# Altium PCB PCB.PcbDoc (part 1 of 2)
Units mil, origin at the board's own origin, x right, y up, seen from the top; angles counter-clockwise.
Board outline 3500 x 2500 mil, 4 copper layers (Layer 1, Layer 2, Layer 3, Layer 4), stack 61.3 mil thick; 75 components, 48 nets, 305 pads, 283 vias.
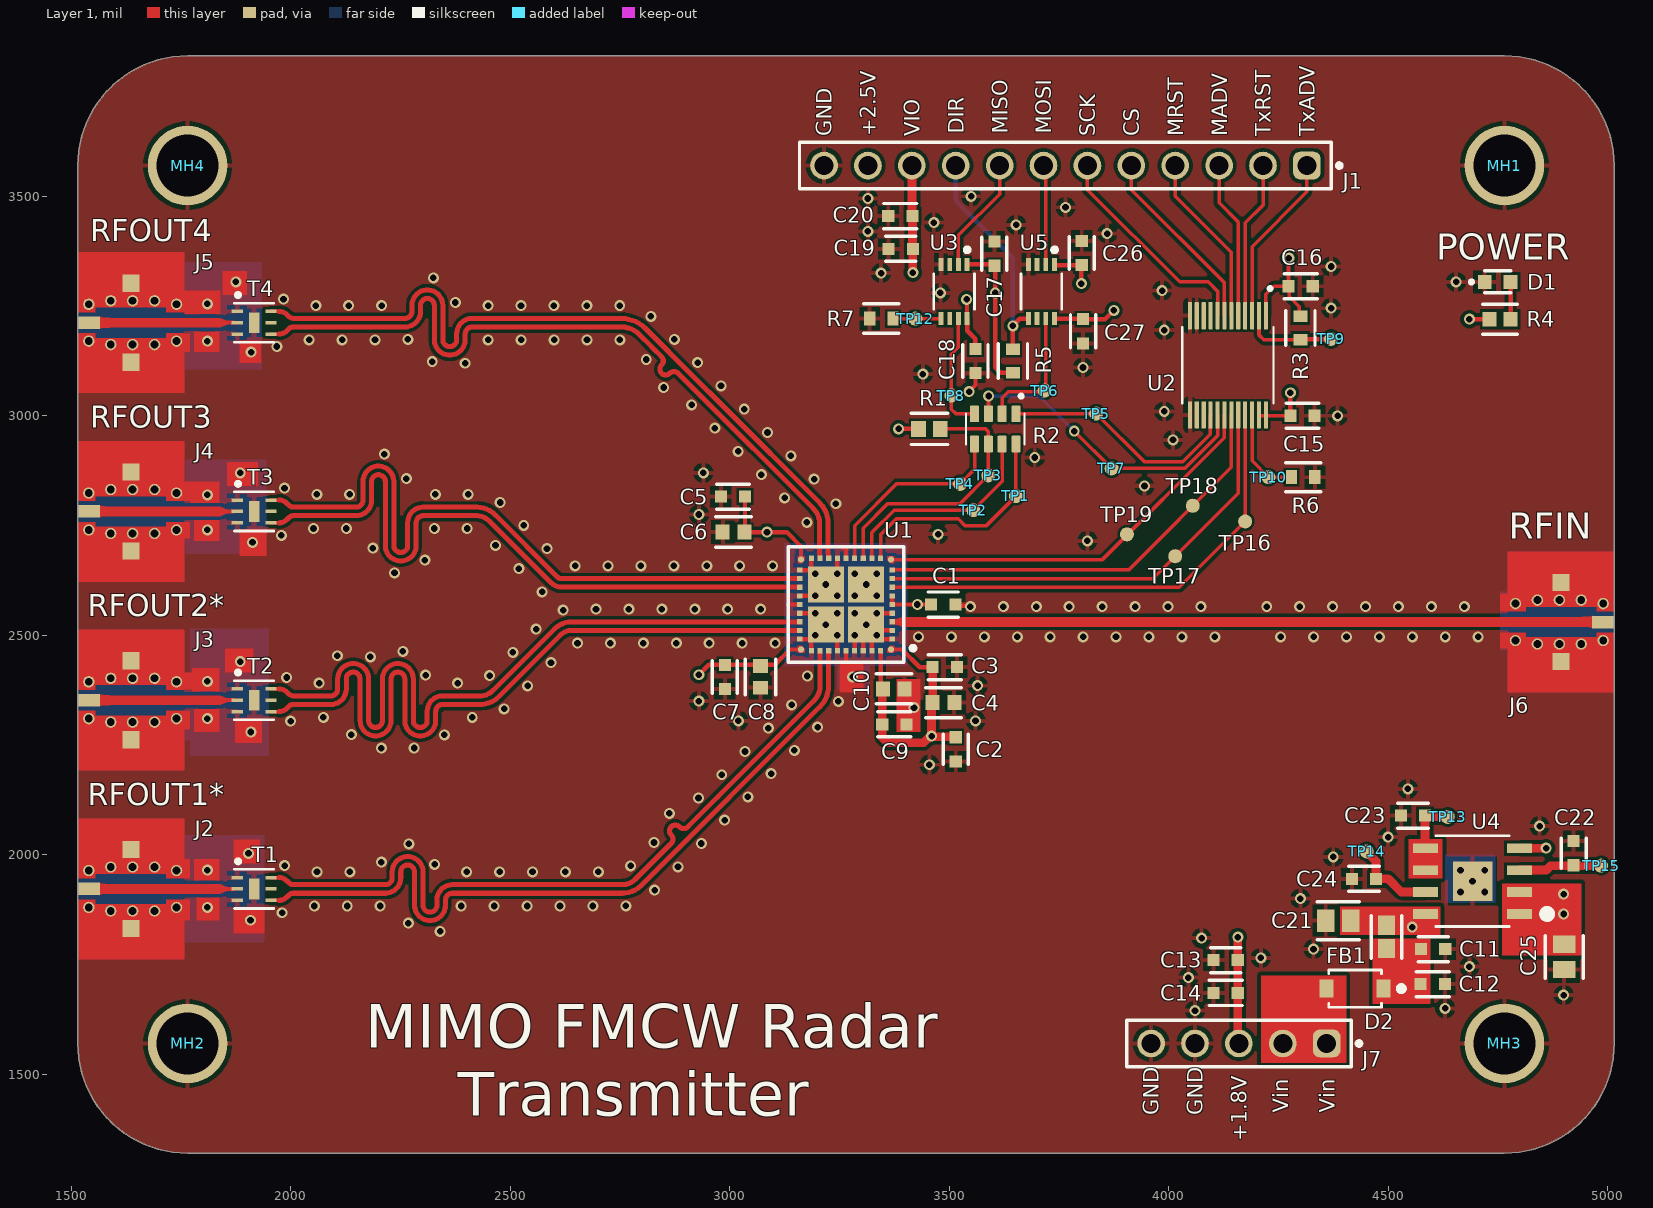
[diagram p0: Layer 1 view]
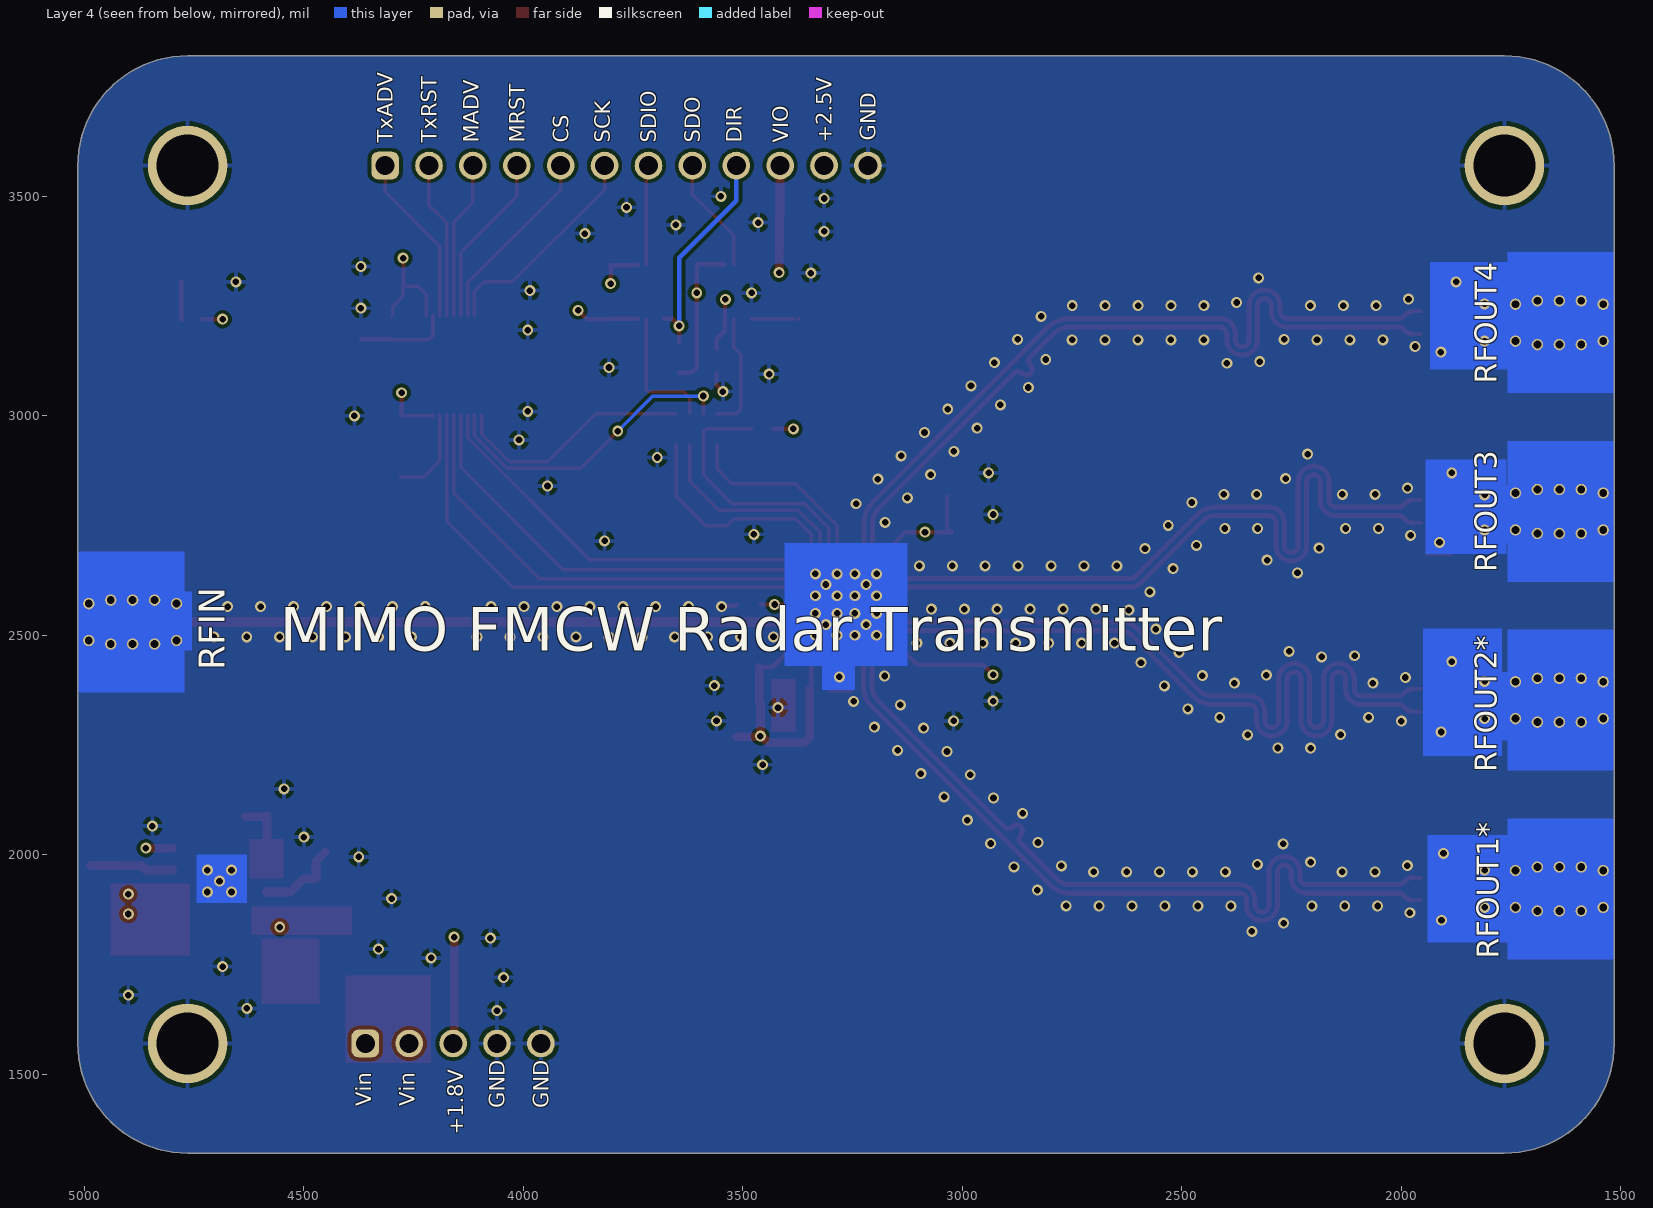
[diagram p1: Layer 4 view, seen from below]
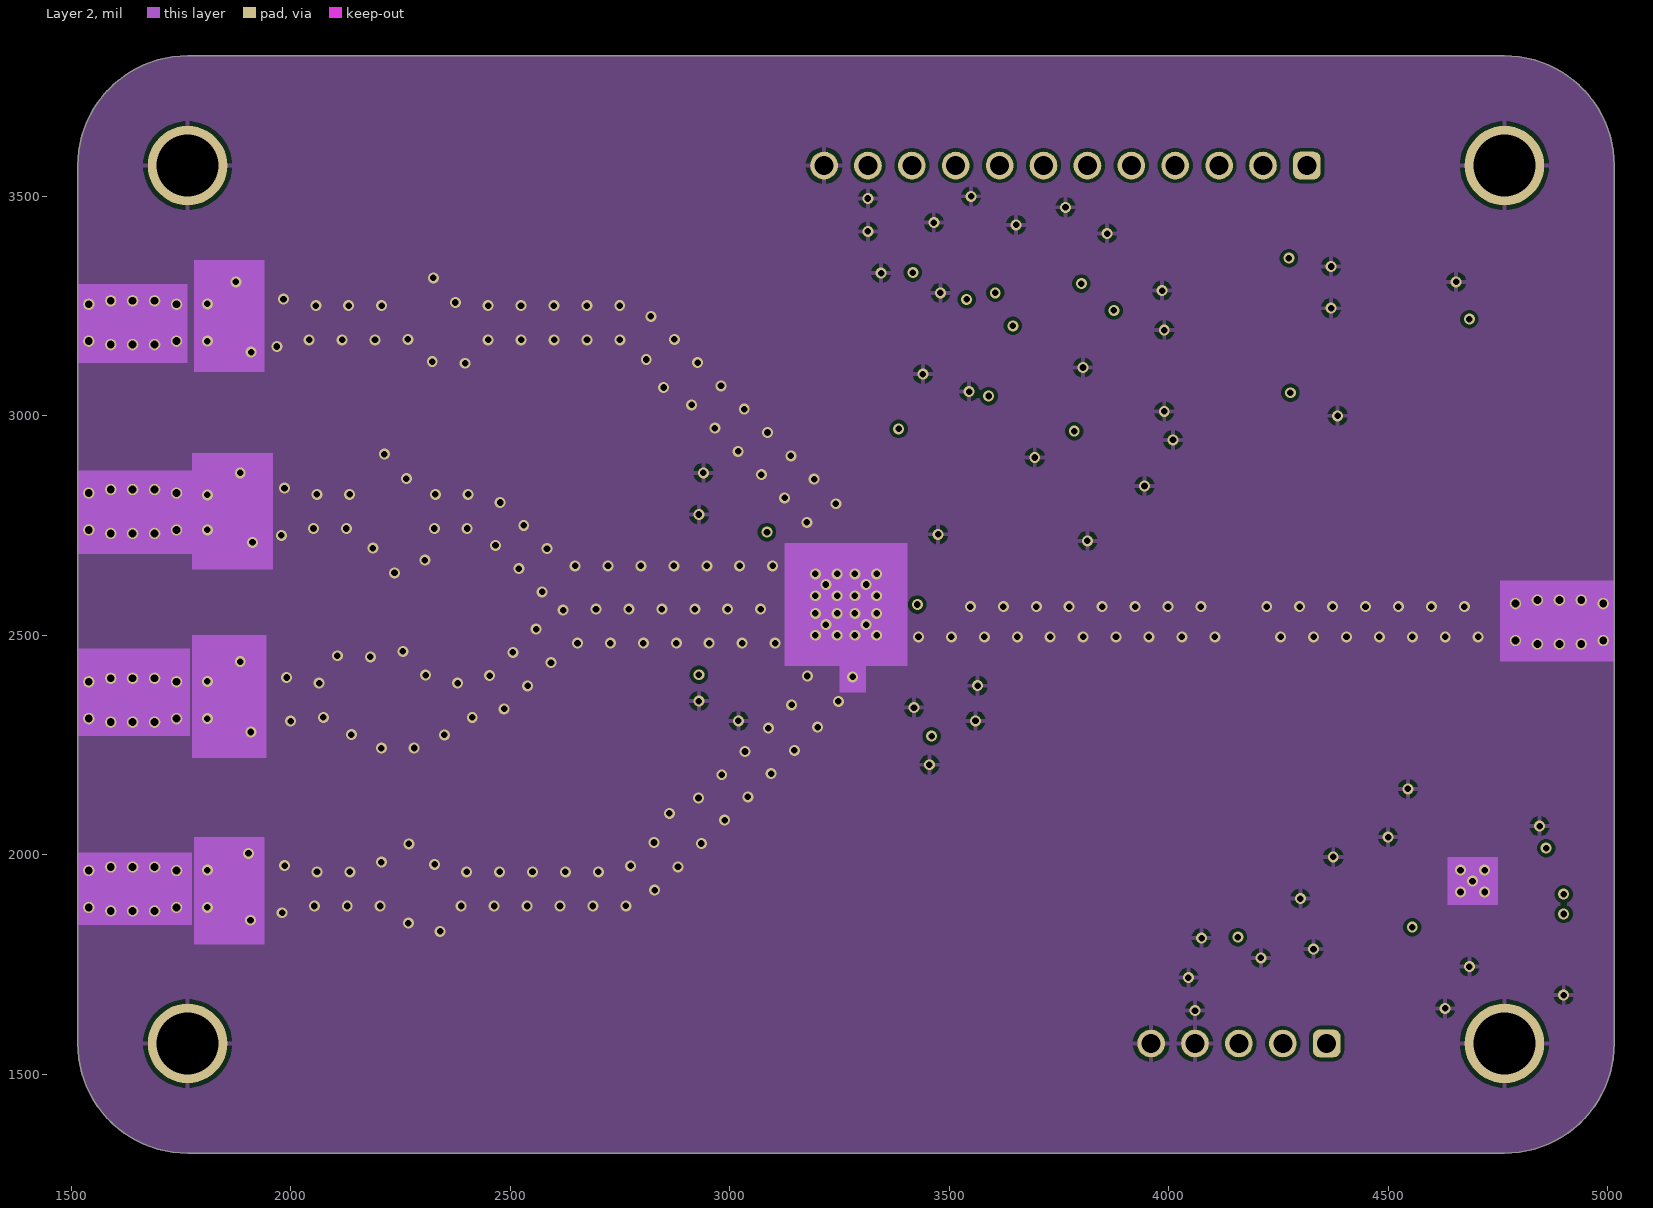
[diagram p2: Layer 2]
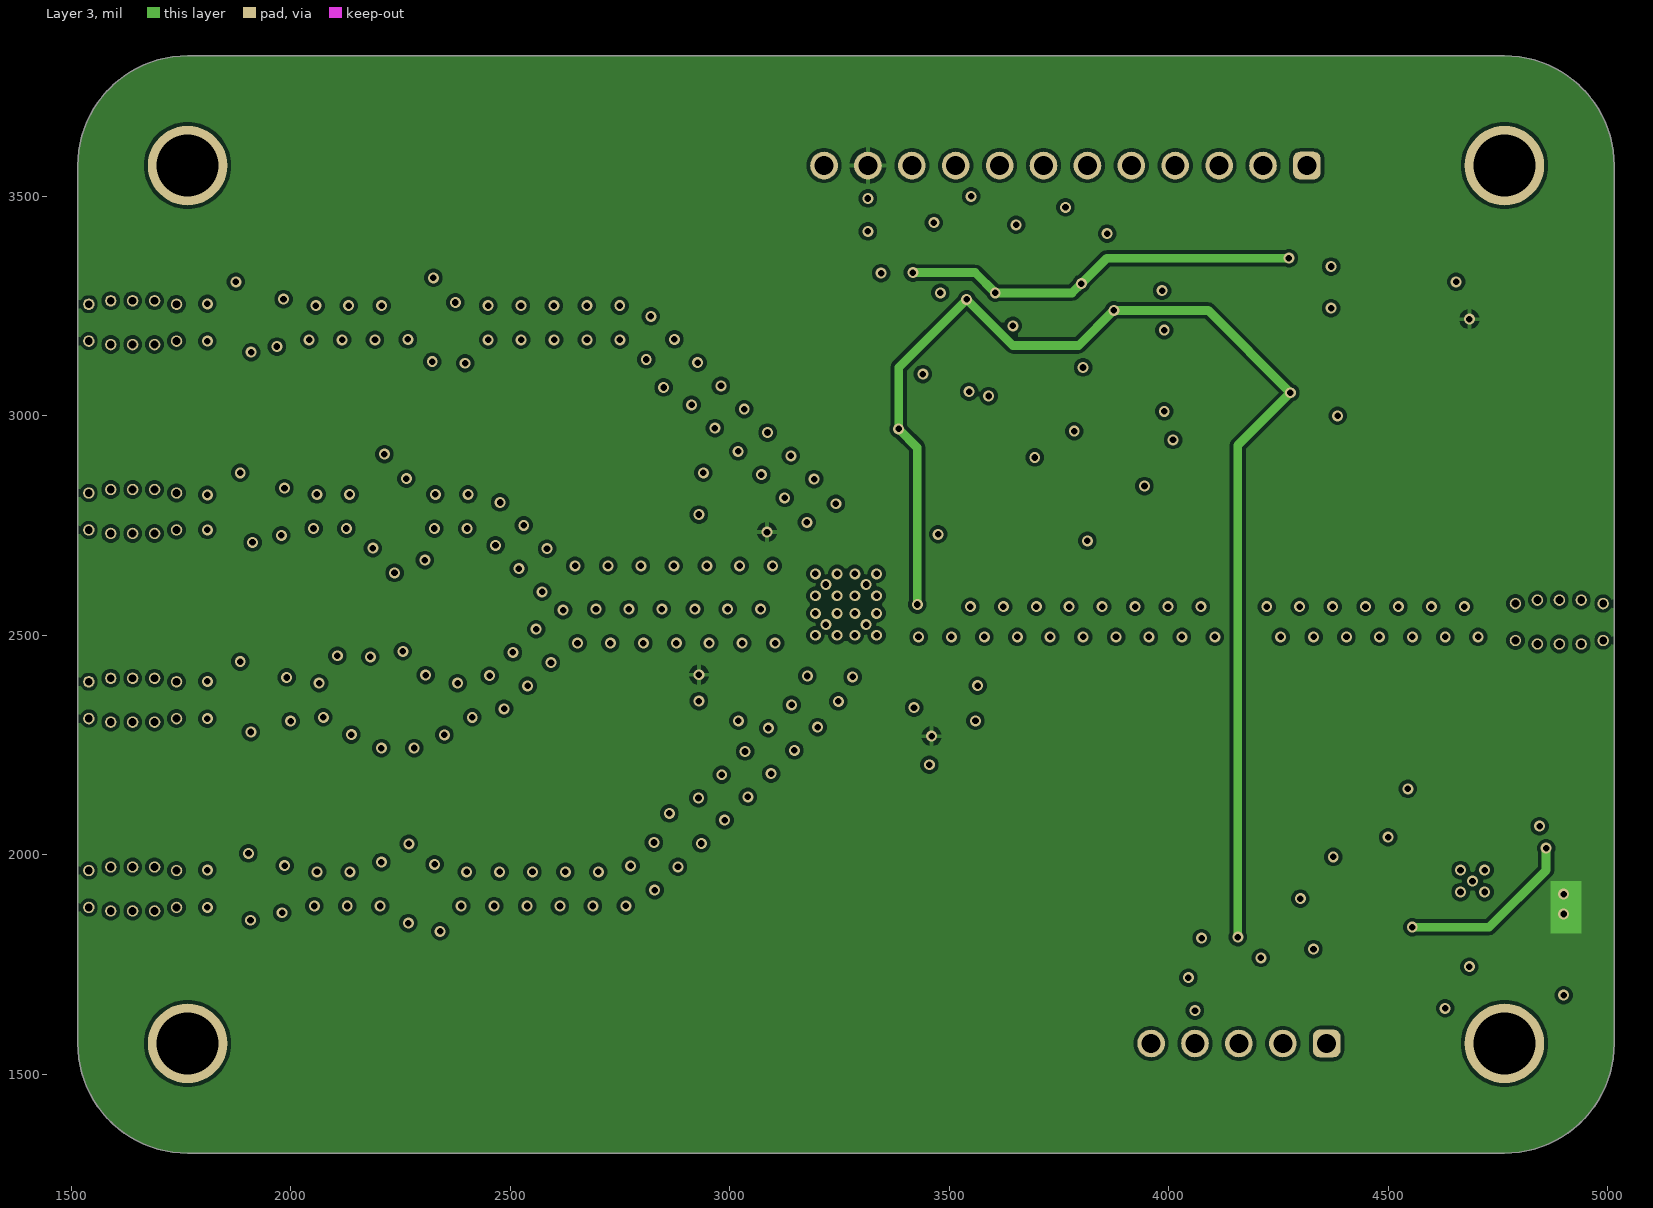
[diagram p3: Layer 3]
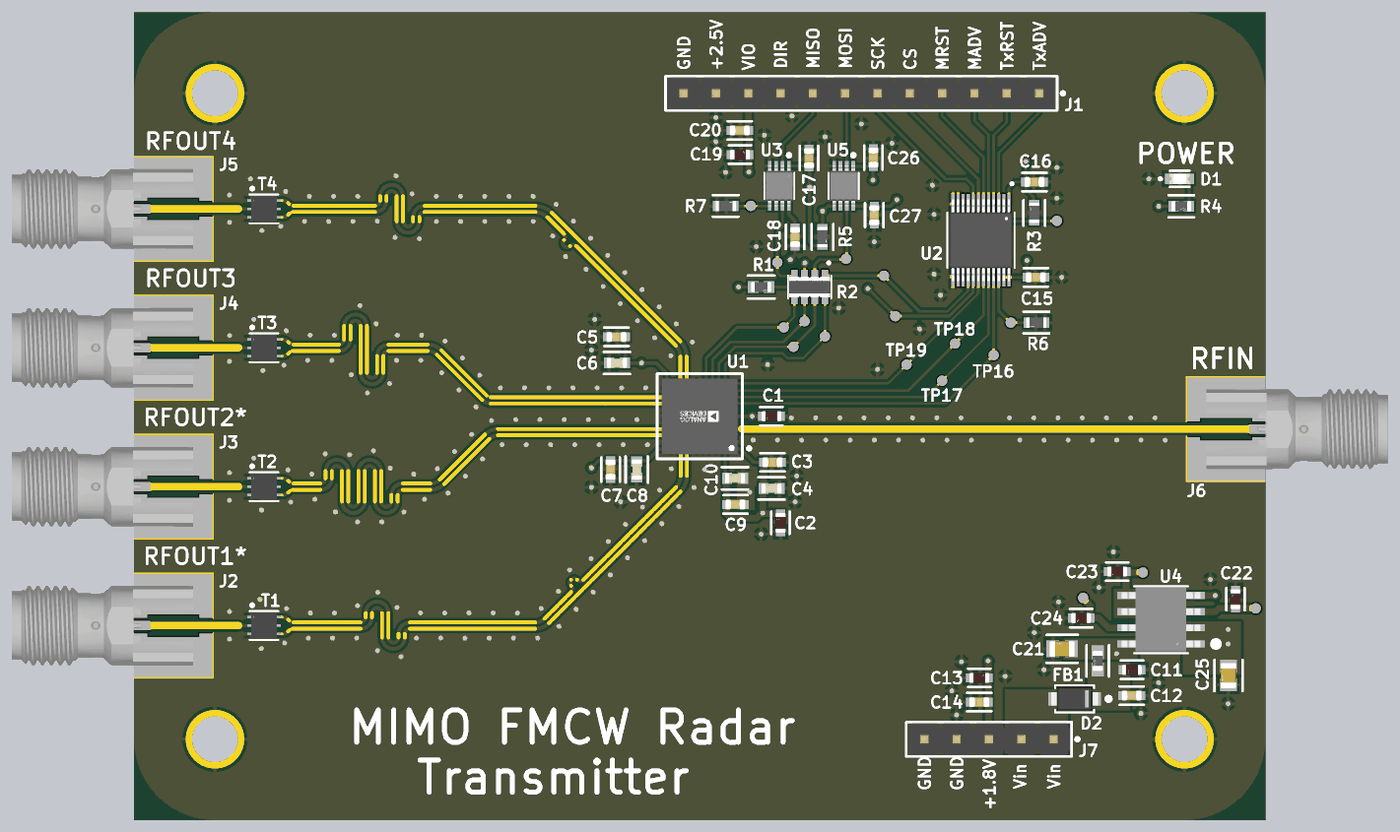
[diagram p4: 3D render of the assembled board from above, using the file's embedded part models]

## Layer stack, top to bottom
Top Solder: solder mask 0.4, Solder Resist, Dk 3.5
Layer 1: signal copper 1.38
Dielectric 2: prepreg 16.86, PP-006, Dk 4.1
Layer 2: signal copper 0.6
Dielectric 1: dielectric 23.62, FR-4, Dk 4.8
Layer 3: signal copper 0.6
Dielectric 3: prepreg 16.86, PP-006, Dk 4.1
Layer 4: signal copper 1.38
Bottom Solder: solder mask 0.4, Solder Resist, Dk 3.5

## Board outline
1515,1570 1515,3570 cw(c1765,3570) 1765,3820 4765,3820 cw(c4765,3570) 5015,3570 5015,1570 cw(c4765,1570) 4765,1320 1765,1320 cw(c1765,1570)

## Design rules (kind name [scope] priority, off if disabled: settings)
Clearance [All] p1: gap=8 ignorepadtopadclearanceinfootprint=FALSE except(6: Arc-Arc Arc-Track Arc-SMDPad Track-Track Track-SMDPad SMDPad-SMDPad SMDPad-Fill SMDPad-Poly SMDPad-Region)
DiffPairsRouting [All] p1: maxlimit=8 minlimit=8 mostfreqgap=8 toplayer_minwidth=11.46 toplayer_maxwidth=11.46 toplayer_prefwidth=11.46 midlayer1_minwidth=11.46 midlayer1_maxwidth=11.46 midlayer1_prefwidth=11.46 midlayer2_minwidth=11.46 midlayer2_maxwidth=11.46 midlayer2_prefwidth=11.46 bottomlayer_minwidth=11.46 bottomlayer_maxwidth=11.46 bottomlayer_prefwidth=11.46 maxuncoupledlength=500
HoleSize [All] p1: absolutevalues=TRUE maxlimit=5000 minlimit=4 maxpercent=80.000 minpercent=20.000
MinimumSolderMaskSliver [All] p1: minsoldermaskwidth=6
PolygonConnect PolygonConnectViaShield [InNamedUnion('Via Shieldings') OR     InNamedUnion('Via Shieldings 1') OR     InNamedUnion('Via Shieldings 2') OR     InNamedUnion('Via Shieldings 3') OR     InNamedUnion('Via Shieldings 4')] p1: connectstyle=Direct reliefconductorwidth=10 reliefentries=4 polygonreliefangle="90 Angle" airgapwidth=10
PolygonConnect [All] p2: connectstyle=Relief reliefconductorwidth=10 reliefentries=4 polygonreliefangle="90 Angle" airgapwidth=10
RoutingVias [All] p1: holewidth=28 width=50 viastyle="Through Hole" minholewidth=28 minwidth=50 maxholewidth=28 maxwidth=50
SilkToSilkClearance [All] p1: silktosilkclearance=6
SilkToSolderMaskClearance [IsPad] p1: minsilkscreentomaskgap=6 clearancetoexposedcopper=TRUE
SolderMaskExpansion [All] p1: expansion=4 istentingtop=FALSE
SupplyNets "Schematic Supply Nets_6" [InNet('VLogic')] p1: voltage=0.000
SupplyNets "Schematic Supply Nets_5" [InNet('VinF')] p2: voltage=0.000
SupplyNets "Schematic Supply Nets_4" [InNet('Vin')] p3: voltage=0.000
SupplyNets "Schematic Supply Nets_2" [InNet('+1.8')] p4: voltage=0.000
SupplyNets "Schematic Supply Nets_1" [InNet('GND')] p5: voltage=0.000
SupplyNets "Schematic Supply Nets" [InNet('+2.5')] p6: voltage=0.000
Width [All] p1: maxlimit=5000 minlimit=6 preferedwidth=10 minimp=50.000000 maximp=50.000000 favimp=50.000000
25 further rules are at their usual default settings.

## Classes and differential pairs
component class Power: C11 C12 C13 C14 C19 C20 C21 C22 C23 C24 C25 D1 D2 FB1 R4 TP13 TP14 TP15 U4
component class Interface: C15 C16 C17 C18 C26 C27 J1 J2 J3 J4 J5 J6 J7 R3 R5 R6 R7 TP9 TP10 TP12 TP16 TP17 TP18 TP19 U2 U3 U5
component class Transmitter: C1 C2 C3 C4 C5 C6 C7 C8 C9 C10 MH1 MH2 MH3 MH4 R1 R2 T1 T2 T3 T4 TP1 TP2 TP3 TP4 TP5 TP6 TP7 TP8 U1
differential pair RFOUT4: +RFOUT4_P -RFOUT4_N
differential pair RFOUT3: +RFOUT3_P -RFOUT3_N
differential pair RFOUT2: +RFOUT2_P -RFOUT2_N
differential pair RFOUT1: +RFOUT1_P -RFOUT1_N

## Components (designator, comment, footprint, x,y, rotation, side; value= is the part's Value field where it differs from the comment)
C1 "1 μF" FP-0603-L_1_6_0_15-W_0_8-MFG 3486.61,2570 r180 top value=1uF
C2 "1 μF" FP-0603-L_1_6_0_15-W_0_8-MFG 3515,2240 r90 top value=1uF
C3 "10 nF" CGA3E2X7R1H103K080AA-Footprint-1 3490.04,2427.3 r0 top value=10nF
C4 "100 pF" FP-C0603C-CF-IPC_C 3487.09,2346.43 r0 top value=100pF
C5 "10 nF" CGA3E2X7R1H103K080AA-Footprint-1 3007.43,2815.87 r180 top value=10nF
C6 "100 pF" FP-C0603C-CF-IPC_C 3008.78,2735 r180 top value=100pF
C7 "10 nF" CGA3E2X7R1H103K080AA-Footprint-1 2989.13,2405 r270 top value=10nF
C8 "100 pF" FP-C0603C-CF-IPC_C 3070,2405 r270 top value=100pF
C9 "10 nF" CGA3E2X7R1H103K080AA-Footprint-1 3375.25,2297.05 r0 top value=10nF
C10 "100 pF" FP-C0603C-CF-IPC_C 3374.12,2377.91 r0 top value=100pF
C11 "1 μF" FP-0603-L_1_6_0_15-W_0_8-MFG 4602.56,1785 r180 top value=1uF
C12 "100 nF" FP-CGA3E-0_3-0_1-MFG 4601.71,1705.11 r0 top value=100nF
C13 "1 μF" FP-0603-L_1_6_0_15-W_0_8-MFG 4130,1760 r0 top value=1uF
C14 "100 nF" FP-CGA3E-0_3-0_1-MFG 4130,1685.04 r180 top value=100nF
C15 "100 nF" FP-CGA3E-0_3-0_1-MFG 4305,3000 r0 top value=100nF
C16 "100 nF" FP-CGA3E-0_3-0_1-MFG 4300.65,3295.13 r0 top value=100nF
C17 "100 nF" FP-CGA3E-0_3-0_1-MFG 3603.14,3369.34 r90 top value=100nF
C18 "100 nF" FP-CGA3E-0_3-0_1-MFG 3560,3125 r270 top value=100nF
C19 "1 μF" FP-0603-L_1_6_0_15-W_0_8-MFG 3389.64,3380.04 r0 top value=1uF
C20 "100 nF" FP-CGA3E-0_3-0_1-MFG 3388.78,3455 r180 top value=100nF
C21 "10 μF" FP-GRM21B-0_15-IPC_C 4386.41,1850 r180 top value=10uF
C22 "1 μF" FP-0603-L_1_6_0_15-W_0_8-MFG 4922.75,2003.58 r90 top value=1uF
C23 "1 μF" FP-0603-L_1_6_0_15-W_0_8-MFG 4556.7,2088.98 r180 top value=1uF
C24 "1 μF" FP-0603-L_1_6_0_15-W_0_8-MFG 4445,1945.04 r180 top value=1uF
C25 "10 μF" FP-GRM21B-0_15-IPC_C 4900.87,1767.24 r270 top value=10uF
C26 "100 nF" FP-CGA3E-0_3-0_1-MFG 3802.14,3370.79 r90 top value=100nF
C27 "100 nF" FP-CGA3E-0_3-0_1-MFG 3805,3192.44 r270 top value=100nF
D1 "LTST-C190KRKT" LTST-C190KRKT-Footprint-1 4750,3305 r0 top
D2 "PMEG2010BER,115" PMEG2010BER,115-Footprint-1 4425,1695 r180 top
FB1 "BLM18AG601SN1D" FP-BLM18-0_15-t0_8-IPC_B 4496.38,1812.67 r270 top value=380mΩ
J1 "61301211121" 61301211121 3765,3570 r180 top
J2 "142-1701-831" 142-1701-831-Footprint-1 1636,1922 r90 top locked
J3 "142-1701-831" 142-1701-831-Footprint-1 1636,2352 r90 top locked
J4 "142-1701-831" 142-1701-831-Footprint-1 1636,2782 r90 top locked
J5 "142-1701-831" 142-1701-831-Footprint-1 1636,3212 r90 top locked
J6 "142-1701-831" 142-1701-831-Footprint-1 4894,2530 r270 top locked
J7 "61300511121" 61300511121 4160,1570 r180 top
MH1 "M3 Plated Mounting Hole - Loose" "M3 Plated Mounting Hole-Footprint-1" 4765,3570 r0 top locked
MH2 "M3 Plated Mounting Hole - Loose" "M3 Plated Mounting Hole-Footprint-1" 1765,1570 r0 top locked
MH3 "M3 Plated Mounting Hole - Loose" "M3 Plated Mounting Hole-Footprint-1" 4765,1570 r0 top locked
MH4 "M3 Plated Mounting Hole - Loose" "M3 Plated Mounting Hole-Footprint-1" 1765,3570 r0 top locked
R1 "200 kΩ" FP-RG1608-IPC_C 3455,2970 r0 top value=200kΩ
R2 "22 Ω" CAY16-22R0F4LF-Footprint-1 3605,2970 r270 top value=22Ω
R3 "10 kΩ" FP-RC0603-0_55-IPC_C 4300,3200 r90 top value=10kR
R4 "150 Ω" FP-RMCF0603-IPC_C 4755,3220 r0 top value=150Ω
R5 "10 kΩ" FP-RC0603-0_55-IPC_C 3645,3125 r270 top value=10kR
R6 "10 kΩ" FP-RC0603-0_55-IPC_C 4306.64,2860 r180 top value=10kR
R7 "10 kΩ" FP-RC0603-0_55-IPC_C 3345.38,3221.22 r0 top value=10kR
T1 "MTY2-243+" MTY2-243+-Footprint-1 1921.5,1922 r0 top
T2 "MTY2-243+" MTY2-243+-Footprint-1 1921.5,2352 r0 top
T3 "MTY2-243+" MTY2-243+-Footprint-1 1921.5,2782 r0 top
T4 "MTY2-243+" MTY2-243+-Footprint-1 1921.5,3212 r0 top
TP1 "Test Point - 32 mil" "Test Point - 32 mil-Footprint-1" 3652.24,2817.24 r90 top
TP2 "Test Point - 32 mil" "Test Point - 32 mil-Footprint-1" 3555,2785 r90 top
TP3 "Test Point - 32 mil" "Test Point - 32 mil-Footprint-1" 3589.25,2864.25 r90 top
TP4 "Test Point - 32 mil" "Test Point - 32 mil-Footprint-1" 3525,2845 r90 top
TP5 "Test Point - 32 mil" "Test Point - 32 mil-Footprint-1" 3835,3005 r90 top
TP6 "Test Point - 32 mil" "Test Point - 32 mil-Footprint-1" 3717.66,3057.34 r90 top
TP7 "Test Point - 32 mil" "Test Point - 32 mil-Footprint-1" 3870,2880 r90 top
TP8 "Test Point - 32 mil" "Test Point - 32 mil-Footprint-1" 3505.09,3046.09 r90 top
TP9 "Test Point - 32 mil" "Test Point - 32 mil-Footprint-1" 4370,3175 r90 top
TP10 "Test Point - 32 mil" "Test Point - 32 mil-Footprint-1" 4227.3,2860 r90 top
TP12 "Test Point - 32 mil" "Test Point - 32 mil-Footprint-1" 3422.86,3221.22 r90 top
TP13 "Test Point - 32 mil" "Test Point - 32 mil-Footprint-1" 4635.91,2086.18 r90 top
TP14 "Test Point - 32 mil" "Test Point - 32 mil-Footprint-1" 4451.26,2007.52 r90 top
TP15 "Test Point - 32 mil" "Test Point - 32 mil-Footprint-1" 4985.23,1975.11 r90 top
TP16 "Test Point - 32 mil" "Test Point - 32 mil-Footprint-1" 4174.37,2759.37 r90 top
TP17 "Test Point - 32 mil" "Test Point - 32 mil-Footprint-1" 4015,2680 r90 top
TP18 "Test Point - 32 mil" "Test Point - 32 mil-Footprint-1" 4055,2795 r90 top
TP19 "Test Point - 32 mil" "Test Point - 32 mil-Footprint-1" 3905,2730 r90 top
U1 "ADAR2001ACCZ" FP-CC-40-7-MFG 3265,2570 r180 top locked
U2 "SN74LVC8T245DGVR" SN74LVC8T245DGVR-Footprint-1 4135,3110 r270 top
U3 "74AXP2T45DCH" 74AXP2T45DCH-Footprint-1 3501.16,3273.11 r270 top
U4 "ADP7156ARDZ-2.5-R7" ADP7156ARDZ-2.5-R7-Footprint-1 4692.27,1935 r180 top
U5 "74AXP2T45DCH" 74AXP2T45DCH-Footprint-1 3700.16,3273.11 r270 top

## Footprints (in the part's own frame and the unit in brackets; to place one, negate y for a bottom-side part, rotate by r counter-clockwise, add the part's x,y. Pads: shape width x height; smd on the part's side, far side on the other; paste and mask are expansions set on the pad)
74AXP2T45DCH-Footprint-1 [mil]
  rect 29.78x11 smd paste+0 mask+0: 1(-71.89,39.53) 2(-71.89,19.84) 3(-71.89,0.16) 4(-71.89,-19.53) 5(51.89,-19.53) 6(51.89,0.16) 7(51.89,19.84) 8(51.89,39.53)
  silkscreen extent -110,-37 31,57, body extent -73,-31 53,51, height 39
142-1701-831-Footprint-1 [mil]
  rect 28.5x50 smd: 1(0,96)
  rect 39.37x39.37 smd paste-39.37 mask+0: 2(-90,0) 2(90,0)
  round 25.87 hole 18: 2(-50,-54) 2(-50,-4) 2(-50,46) 2(-42,96) 2(-42,-104) 2(42,96) 2(42,-104) 2(50,-54) 2(50,-4) 2(50,46)
  Layer 1 region: -24.25,81 -35,81 -35,-81 -24.25,-81 -24.25,-121 -160,-121 -160,121 -24.25,121
  Layer 1 region: 160,-121 24.25,-121 24.25,-81 35,-81 35,81 24.25,81 24.25,121 160,121
  Layer 4 region: 160,-121 -160,-121 -160,121 160,121
  body extent -123,-62 123,500, height 131
61300511121 [mm] "Pin Header, pitch 2.54 mm, THT, Vertical, single row, 5p"
  rrect50% 1.6x1.6 hole 1.1: 1(-5.08,0)
  round 1.6 hole 1.1: 2(-2.54,0) 3(0,0) 4(2.54,0) 5(5.08,0)
  silkscreen extent -7.07,-1.35 6.5,1.35, body extent -6.35,-1.27 6.35,1.27, height 8.57
61301211121 [mm] "Pin Header, pitch 2.54 mm, THT, Vertical, single row, 12p"
  rrect50% 1.6x1.6 hole 1.1: 1(-13.97,0)
  round 1.6 hole 1.1: 2(-11.43,0) 3(-8.89,0) 4(-6.35,0) 5(-3.81,0) 6(-1.27,0) 7(1.27,0) 8(3.81,0) 9(6.35,0) 10(8.89,0) 11(11.43,0) 12(13.97,0)
  silkscreen extent -15.96,-1.35 15.39,1.35, body extent -15.24,-1.27 15.24,1.27, height 8.57
ADP7156ARDZ-2.5-R7-Footprint-1 [mil]
  rect 57.55x22 smd paste+0 mask+0: 1(-107.27,70) 2(-107.27,20) 3(-107.27,-30) 4(-107.27,-80) 5(107.27,-80) 6(107.27,-30) 7(107.27,20) 8(107.27,70)
  rect 90x90 smd paste+0 mask+0: EP(0,-5)
  silkscreen extent -178,-109 84,99, body extent -122,-104 122,94, height 69
CAY16-22R0F4LF-Footprint-1 [mm]
  rrect25% 0.97x0.53 smd: 1(-0.875,1.2) 2(-0.875,0.4) 3(-0.875,-0.4) 4(-0.875,-1.2) 5(0.875,-1.2) 6(0.875,-0.4) 7(0.875,0.4) 8(0.875,1.2)
  silkscreen extent -2,-1.7 0.9,1.7, body extent -0.8,-1.6 0.8,1.6, height 0.6
CGA3E2X7R1H103K080AA-Footprint-1 [mm]
  rect 0.7x0.7 smd paste+0 mask+0: 1(-0.7,0) 2(0.7,0)
  silkscreen extent -0.95,-0.72 0.95,0.72, body extent -1.15,-0.65 1.15,0.65, height 0.25
FP-0603-L_1_6_0_15-W_0_8-MFG [mm]
  rect 0.7x0.7 smd paste+0 mask+0: 1(-0.7,0) 2(0.7,0)
  silkscreen extent -0.87,-0.72 0.87,0.72, body extent -1.15,-0.58 1.15,0.58, height 0.25
FP-BLM18-0_15-t0_8-IPC_B [mil]
  rect 43.55x37.73 smd paste+0 mask+0: 1(-26.62,0) 2(26.62,0)
  silkscreen extent -48,-35 48,35, body extent -58,-29 58,29, height 10
FP-C0603C-CF-IPC_C [mil]
  rect 31.75x33.79 smd paste+0 mask+0: 1(-24.64,0) 2(24.64,0)
  silkscreen extent -41,-34 41,34, body extent -44,-23 44,23, height 10
FP-CC-40-7-MFG [mm]
  round 0.355 smd paste+0 mask+0: 1(-2.602,2.602) 11(-2.602,-2.602) 21(2.602,-2.602) 31(2.602,2.602)
  rect 0.3x0.3 smd paste+0 mask+0: 2(-2.675,2) 3(-2.675,1.5) 4(-2.675,1) 5(-2.675,0.5) 6(-2.675,0) 7(-2.675,-0.5) 8(-2.675,-1) 9(-2.675,-1.5) 10(-2.675,-2) 12(-2,-2.675) 13(-1.5,-2.675) 14(-1,-2.675) 15(-0.5,-2.675) 16(0,-2.675) 17(0.5,-2.675) 18(1,-2.675) 19(1.5,-2.675) 20(2,-2.675) 22(2.675,-2) 23(2.675,-1.5) 24(2.675,-1) 25(2.675,-0.5) 26(2.675,0) 27(2.675,0.5) 28(2.675,1) 29(2.675,1.5) 30(2.675,2) 32(2,2.675) 33(1.5,2.675) 34(1,2.675) 35(0.5,2.675) 36(0,2.675) 37(-0.5,2.675) 38(-1,2.675) 39(-1.5,2.675) 40(-2,2.675)
  rect 2.08x2.08 smd paste+0 mask+0: 41(-1.16,1.16) 42(1.16,1.16) 43(-1.16,-1.16) 44(1.16,-1.16)
  Layer 1 region: -2.8,-2.8 -2.375,-2.8 -2.375,-2.55 -2.55,-2.375 -2.8,-2.375
  Layer 1 region: 2.8,-2.8 2.375,-2.8 2.375,-2.55 2.55,-2.375 2.8,-2.375
  Layer 1 region: 2.8,2.8 2.375,2.8 2.375,2.55 2.55,2.375 2.8,2.375
  Layer 1 region: -2.8,2.8 -2.375,2.8 -2.375,2.55 -2.55,2.375 -2.8,2.375
  silkscreen extent -4,-3.35 3.35,3.35, body extent -3.55,-3.55 3.55,3.55, height 0.25
FP-CGA3E-0_3-0_1-MFG [mm]
  rect 0.7x0.7 smd paste+0 mask+0: 1(-0.7,0) 2(0.7,0)
  silkscreen extent -0.95,-0.72 0.95,0.72, body extent -1.15,-0.65 1.15,0.65, height 0.25
FP-GRM21B-0_15-IPC_C [mil]
  rect 39.6x51.5 smd paste+0 mask+0: 1(-28.59,0) 2(28.59,0)
  silkscreen extent -48,-43 48,43, body extent -52,-31 52,31, height 10
FP-RC0603-0_55-IPC_C [mil]
  rect 25.93x31.97 smd paste+0 mask+0: 1(-26.64,0) 2(26.64,0)
  silkscreen extent -40,-33 40,33, body extent -44,-22 44,22, height 10
FP-RG1608-IPC_C [mil]
  rect 33.66x35.68 smd paste+0 mask+0: 1(-24.63,0) 2(24.63,0)
  silkscreen extent -41,-35 41,35, body extent -45,-24 45,24, height 10
FP-RMCF0603-IPC_C [mil]
  rect 31.73x33.79 smd paste+0 mask+0: 1(-23.66,0) 2(23.66,0)
  silkscreen extent -40,-34 40,34, body extent -43,-23 43,23, height 10
LTST-C190KRKT-Footprint-1 [mm]
  rect 0.8x0.8 smd mask+0: 1(-0.762,0) 2(0.738,0)
  silkscreen extent -1.6,-0.64 0.76,0.64, body extent -0.8,-0.4 0.8,0.4, height 0.8
"M3 Plated Mounting Hole-Footprint-1" [mm]
  round 4.6 hole 3.6 paste-2539.97 mask+0: 1(0,0)
MTY2-243+-Footprint-1 [mil]
  rect 26x8 smd paste+0 mask+0: 1(-43.5,26) 2(-43.5,0) 3(-43.5,-26) 4(33.5,-26) 5(33.5,0) 6(33.5,26)
  rect 24x47 smd paste+0 mask+0: 7(-5,0)
  silkscreen extent -50,-44 40,67, body extent -44,-39 34,39, height 41
PMEG2010BER,115-Footprint-1 [mil]
  rect 32x41 smd paste+0 mask+0: 1(-65,0) 2(65,0)
  silkscreen extent -110,-43 60,43, body extent -73,-37 73,37, height 43
SN74LVC8T245DGVR-Footprint-1 [mm]
  rrect25% 1.57x0.24 smd: 1(-2.997,2.2) 2(-2.997,1.8) 3(-2.997,1.4) 4(-2.997,1) 5(-2.997,0.6) 6(-2.997,0.2) 7(-2.997,-0.2) 8(-2.997,-0.6) 9(-2.997,-1) 10(-2.997,-1.4) 11(-2.997,-1.8) 12(-2.997,-2.2) 13(2.743,-2.2) 14(2.743,-1.8) 15(2.743,-1.4) 16(2.743,-1) 17(2.743,-0.6) 18(2.743,-0.2) 19(2.743,0.2) 20(2.743,0.6) 21(2.743,1) 22(2.743,1.4) 23(2.743,1.8) 24(2.743,2.2)
  silkscreen extent -4.67,-2.64 2.07,2.64, body extent -3.33,-2.5 3.07,2.5, height 1.2
"Test Point - 32 mil-Footprint-1" [mil]
  round 32 smd: 1(0,0)

## Part data
C1 C2 C11 C13 C19 C22 C23 C24: library part CMP-00100-1, "Ceramic Capacitor, Multilayer, Ceramic, 50V, 10% +Tol, 10% -Tol, X7R, 15% TC, 1uF, Surface Mount, 0603", Capacitor Type=Ceramic, Case/Package=0603, Max Operating Temperature=125°C, Min Operating Temperature=-55°C, Package Shape=Rectangular, Package Style=SMTMeter, Rated DC Voltage (URdc)=50V, Temperature Characteristics Code=X7R, Tolerance  (fill in as +-)=10%, Dielectric Material=Ceramic, Height=0.8mm, JESD-609 Code=e3, Length=1.6mm, Mounting Technology="Surface Mount", Multilayer=Yes, Packaging="Tape and Reel", Pins=2, Reach SVHC Compliant=Yes, RoHS Compliant=Yes, Terminal Finish=Tin, Termination=Wraparound, Tolerance (fill in as +-)=10%, Width=0.8mm
C3 C5 C7 C9: library part CMP-00157-1, "CGA Series 0603 10 nF 50 V ±10 % Tolerance X7R SMT Multilayer Ceramic Capacitor", Case Code (Imperial)=0603, Case Code (Metric)=1608, Dielectric=X7R, Dielectric Material=Ceramic, Manufacturer Lifecycle Status=PRODUCTION, Max Operating Temperature=125°C, Min Operating Temperature=-55°C, Ratings=AEC-Q200, Tolerance=10%, Voltage Rating=50V, Case/Package=0603, China RoHS=Compliant, Composition=Ceramic, Height=800µm, Lead Free="Lead Free", Length=1.6mm, Lifecycle Status=Production, Material=Ceramic, Max Length=1.7mm, Max Width=900µm, Min Length=1.5mm, Min Width=700µm, Mounting Technology="Surface Mount", Number of Terminals=2, REACH SVHC=Yes, RoHS=Compliant, Schedule B="8532240020, 8532240020", Termination=SMD/SMT, Thickness=889µm, Voltage Rating (DC)=50V, Weight=2.012816mg, Width=800µm
C4 C6 C8 C10: library part CMP-00365-1, "Multilayer Ceramic Capacitors MLCC – SMD/SMT; KEMET; C0603C101J5GACTU; 100 pF; 0603; 50 V; 50 V", Case Code (Imperial)=0603, Dielectric=C0G, Dielectric Material=Ceramic, Max Operating Temperature=125°C, Min Operating Temperature=-55°C, Temperature Coefficient=30ppm/°C, Tolerance=5%, Voltage=50V, Case/Package=0603, China RoHS=Compliant, Contact Material=Tin, Country of Origin="Mainland China, Mexico", Depth=800µm, Dissipation Factor=0.1%, Export Control Classification Number (ECCN) Code=EAR99, Harmonized Tariff Schedule (HTS) Code=8532.24.00.20, Height=800µm, Introduction Date=1997-02-01, Lead Free="Lead Free", Lead Pitch=700µm, Length=1.6mm, Lifecycle Status=Production, Material=Ceramic, Mounting Technology="Surface Mount", Number of Terminals=2, Packaging="Cut Tape", Pins=2, Radiation Hardening=No, REACH SVHC=Yes, RoHS=Compliant, Schedule B="8532240020, 8532240020", Termination=SMD/SMT, Thickness=863.6µm, Voltage Rating=50V, Voltage Rating (AC)=50V, Voltage Rating (DC)=50V, Width=800µm
C12 C14 C15 C16 C17 C18 C20 C26 C27: library part CMP-00054-1, "Ceramic Capacitor, Multilayer, Ceramic, 50V, 10% +Tol, 10% -Tol, X7R, 15% TC, 0.1uF, Surface Mount, 0603", Capacitor Type=Ceramic, Case/Package=0603, Max Operating Temperature=125°C, Min Operating Temperature=-55°C, Package Shape=Rectangular, Package Style=SMTMeter, Rated DC Voltage (URdc)=50V, Temperature Characteristics Code=X7R, Tolerance  (fill in as +-)=10%, Dielectric Material=Ceramic, Height=0.8mm, JESD-609 Code=e3, Length=1.6mm, Mounting Technology="Surface Mount", Multilayer=Yes, Packaging="Tape and Reel", Pins=2, Reach SVHC Compliant=Yes, Reference Standard=AEC-Q200, RoHS Compliant=Yes, Terminal Finish=Nickel, Termination=Wraparound, Tolerance (fill in as +-)=10%, Width=0.8mm
C21 C25: library part CMP-00053-1, "Ceramic Capacitor, Multilayer, Ceramic, 25V, 20% +Tol, 20% -Tol, X5R, 15% TC, 10uF, Surface Mount, 0805", Capacitor Type=Ceramic, Case/Package=0805, Max Operating Temperature=85°C, Min Operating Temperature=-55°C, Package Shape=Rectangular, Package Style=SMTMeter, Rated DC Voltage (URdc)=25V, Temperature Characteristics Code=X5R, Tolerance  (fill in as +-)=20%, Dielectric Material=Ceramic, Height=1.25mm, JESD-609 Code=e3, Length=2mm, Mounting Technology="Surface Mount", Multilayer=Yes, Packaging="Tape and Reel", Pins=2, Reach SVHC Compliant=Yes, RoHS Compliant=Yes, Terminal Finish=Nickel, Termination=Wraparound, Tolerance (fill in as +-)=20%, Width=1.25mm
D1: library part CMP-00109-2, "Red, Single Color LED, Red, Water Clear", Color=Red, Forward Current=30mA, Forward Voltage=2.4V, Max Operating Temperature=85°C, Min Operating Temperature=-30°C, Reverse Voltage-Max=5V, Channels=1, Color@wavelength=Red, Lens Style="WATER CLEAR", Luminous Intensity-Min=130cd, Luminous Intensity-Nom=54mcd, Mounting Technology="Surface Mount", Optoelectronic Device Type="SINGLE COLOR LED", Overall Height=0.8mm, Packaging="Tape and Reel", Pins=2, Reach SVHC Compliant=Yes, RoHS Compliant=Yes, Shape=Rectangular, Size=1.1mm, Terminal Pitch=1.5mm, Viewing Angle=130°
D2: library part CMP-00387-1, "PMEG2010 Series 20 V 1 A SMT Low VF MEGA Schottky Barrier Rectifier - SOD-123W", Average Rectified Current=1A, Forward Voltage=340mV, Manufacturer Lifecycle Status="RELEASED FOR SUPPLY", Max Forward Surge Current (Ifsm)=50A, Max Operating Temperature=150°C, Max Power Dissipation=1.8W, Max Repetitive Reverse Voltage (Vrrm)=20V, Max Reverse Leakage Current=50µA, Min Operating Temperature=-55°C, Contact Plating=Tin, Country of Origin="Mainland China", Element Configuration=Single, Export Control Classification Number (ECCN) Code=EAR99, Forward Current=1A, Harmonized Tariff Schedule (HTS) Code=8541.10.00.80, Introduction Date=2009-04-22, Lead Free="Lead Free", Lifecycle Status=Production, Max Output current=1A, Max Reverse Voltage (DC)=20V, Max Surge Current=50A, Mounting Technology="Surface Mount", Number of Elements=1, Number of Terminals=2, Peak Non-Repetitive Surge Current=50A, Peak Reverse Current=50µA, Pins=2, Radiation Hardening=No, REACH SVHC=No, Reverse Standoff Voltage=20V, RoHS=Compliant, Schedule B=8541100050
FB1: library part CMP-00321-1, "Ferrite Beads Multi-Layer 600Ohm 25% 100MHz 500mA 380mOhm DCR 0603 Automotive Paper T/R", Case Code (Imperial)=0603, Case Code (Metric)=1608, Clock Frequency=100MHz, Current Rating=500mA, DC Resistance (DCR)=380mΩ, Max Operating Temperature=125°C, Min Operating Temperature=-55°C, Tolerance=25%, Case/Package=0603, Core Material=Ferrite, Country of Origin="Japan, Thailand", DC Current=500mA, Depth=800µm, ESR=380mΩ, Export Control Classification Number (ECCN) Code=EAR99, Frequency=100MHz, Harmonized Tariff Schedule (HTS) Code=8504.50.80.00, Height=800µm, Impedance=600Ω, Introduction Date=2001-08-28, Lead Free="Lead Free", Length=1.6mm, Lifecycle Status=Production, Material="Ferrite, Steel", Max Current Rating=500mA, Max DC Current=500mA, Military Standard=Not, Number of Circuits=1, Number of Lines=1, Number of Terminals=2, Packaging="Cut Tape", Pins=2, Radiation Hardening=No, REACH SVHC=Yes, RMS Current (Irms)=500mA, RoHS=Compliant, Schedule B="8543706000, 8543706000", Shielding=Unshielded, Termination=SMD/SMT, Test Frequency=100MHz, Weight=2.012816mg, Width=800µm
J1: library part CMP-00202-1, "THT Vertical Pin Header WR-PHD, Pitch 2.54 mm, Single Row, 12 pins", Color=Black, Contact Resistance=20mΩ, Current Rating=3A, Operating Supply Voltage=250V, Connector Type="Male Pin", Contact Material=Copper, Contact Mating Length=5.9944mm, Contact Plating=Gold, Gender=Male, Lead Pitch=2.54mm, Mounting Technology="Through Hole", Number of Contacts=12, Number of Positions=12, Number of Rows=1, Orientation=Vertical, Packaging=Bulk, Pins=12, Pitch=2.54mm, RoHS=Compliant, Termination=Solder
J2 J3 J4 J5 J6: library part CMP-00382-1, "RF SMA Connector, 1 Contact(s), Female, Board Mount, Surface Mount Terminal, Locking, Jack", Case/Package=SMA, Clock Frequency=26.5GHz, Contact Resistance=4mΩ, Dielectric Material=PTFE, Housing Color=Gold, Insulation Resistance=1GΩ, Max Operating Temperature=165°C, Min Operating Temperature=-65°C, Voltage Rating=170V, Body Material=Brass, Body Plating=Gold, Connector Type="SMA, Socket", Contact Gender=Female, Contact Material=Copper, Contact Plating=Gold, Export Control Classification Number (ECCN) Code=EAR99, Fastening Type=Threaded, Frequency=26.5GHz, Gender=Male, Harmonized Tariff Schedule (HTS) Code=8536.69.40.10, Impedance=50Ω, Insertion Loss (dB)=0.55dB, Introduction Date=2010-04-24, Lifecycle Status=Production, Mounting Technology=Edge, Number of Ports=1, Orientation=Straight, Pins=1, Polarity=Standard, REACH SVHC=Yes, RoHS=Compliant, Shell Material=Brass, Termination=Solder
J7: library part CMP-00200-1, "THT Vertical Pin Header WR-PHD, Pitch 2.54 mm, Single Row, 5 pins", Color=Black, Contact Resistance=20mΩ, Current Rating=3A, Max Operating Temperature=105°C, Min Operating Temperature=-40°C, Operating Supply Voltage=250V, Connector Type="Male Pin", Contact Material=Gold, Contact Mating Length=5.9944mm, Contact Plating=Gold, Gender=Male, Height=8.89mm, Lead Free="Lead Free", Lead Pitch=2.54mm, Mounting Technology="Through Hole", Number of Contacts=5, Number of Positions=5, Number of Rows=1, Orientation=Vertical, Packaging=Bulk, Pins=5, Pitch=2.54mm, RoHS=Compliant, Termination=Solder, Voltage Rating=250V
MH1 MH2 MH3 MH4: library part CMP-00204-1, "Plated M3 mounting hole with loose tolerance. 3.6 mm hole diameter, 4.6 mm plated diameter."
R1: library part CMP-00366-1, "Res Thin Film 0603 200K Ohm 0.1% 0.1W(1/10W) ±25ppm/C Sulfur Resistant Pad SMD Automotive T/R", Case Code (Imperial)=0603, Case Code (Metric)=1608, Max Operating Temperature=155°C, Max Power Dissipation=100mW, Min Operating Temperature=-55°C, Temperature Coefficient=25ppm/°C, Tolerance=0.1%, Voltage Rating=100V, Voltage Rating (DC)=75V, Case/Package=0603, Composition="Thin Film", Country of Origin="Mainland China, Japan", Export Control Classification Number (ECCN) Code=EAR99, Features="Automotive AEC-Q200", Harmonized Tariff Schedule (HTS) Code=8533.21.00.30, Height=400µm, Introduction Date=2006-03-30, Lead Free="Lead Free", Length=1.6mm, Lifecycle Status=Production, Mounting Technology="Surface Mount", Number of Terminals=2, Number of Terminations=2, Power Dissipation=100mW, Power Rating=100mW, REACH SVHC=Yes, RoHS=Compliant, Schedule B=8533210045, Termination=SMD/SMT, Weight=2.012816mg, Width=800µm, Working Voltage=100V
R2: library part CMP-00370-1, "Res Thick Film Array 22 Ohm 1% 0.25W(1/4W) ±200ppm/C ISOL 8-Pin 1206(4 X 0603) Convex SMD T/R", Case Code (Imperial)=1206, Case Code (Metric)=3216, Max Operating Temperature=125°C, Min Operating Temperature=-55°C, Number of Resistors=4, Power Dissipation=250mW, Power Per Element=62.5mW, Temperature Coefficient=200ppm/°C, Tolerance=1%, Voltage Rating (DC)=50V, Case/Package=1206, China RoHS=Non-Compliant, Circuit Type=Isolated, Contact Plating=Tin, Depth=1.6mm, Export Control Classification Number (ECCN) Code=EAR99, Height=500µm, Introduction Date=2003-04-07, Lead Pitch=800µm, Length=3.2mm, Lifecycle Status=Production, Military Standard=Not, Mounting Technology="Surface Mount", Number of Circuits=4, Number of Elements=1, Number of Terminals=8, Pins=8, REACH SVHC=Yes, RoHS=Compliant, Schedule B="8533210025, 8533210025", Terminal Pitch=800µm, Termination=Convex, Width=1.6mm, Working Voltage=50V
R3 R5 R6 R7: library part CMP-00049-1, "Fixed Resistor, Metal Glaze/thick Film, 0.1W, 10000ohm, 75V, 1% +/-Tol, 100ppm/Cel, Surface Mount, 0603", Case/Package=0603, Max Operating Temperature=155°C, Min Operating Temperature=-55°C, Package Height=0.45mm, Package Length=1.6mm, Package Shape=Rectangular, Package Width=0.8mm, Power=100mW, Rated Temperature=70°C, Resistor Type="FIXED RESISTOR", Temperature Coefficient (ppm/Cel)=100, Tolerance=1%, Working Voltage=75V, Additional Feature="LASER TRIMMABLE", Construction=Chip, JESD-609 Code=e3, Mounting Technology="Surface Mount", Packaging="Tape and Reel", Pins=2, Reach SVHC Compliant=Yes, RoHS Compliant=Yes, Technology="METAL GLAZE/THICK FILM", Terminal Finish=Nickel, Termination=Wraparound
R4: library part CMP-00177-1, "150 Ohm, Res Thick Film 0603 1% 0.1W ±100ppm/°C Molded SMD Paper T/R", Case Code (Imperial)=0603, Case Code (Metric)=1608, Max Operating Temperature=155°C, Max Power Dissipation=100mW, Min Operating Temperature=-55°C, Temperature Coefficient=100ppm/°C, Tolerance=1%, Voltage Rating=75V, Case/Package=0603, China RoHS=Non-Compliant, Composition="Thick Film", Contact Plating=Tin, Features="Automotive AEC-Q200", Height=450µm, Lead Free="Lead Free", Length=1.5494mm, Lifecycle Status=Production, Mounting Technology="Surface Mount", Number of Terminals=2, Number of Terminations=2, Packaging="Cut Tape (CT)", Power Dissipation=100mW, Power Rating=100mW, Radiation Hardening=No, REACH SVHC=Yes, RoHS=Compliant, Schedule B="8533210045, 8533210045", Width=800µm, Working Voltage=75V
T1 T2 T3 T4: library part CMP-00368-1, "RF Transformer, 10000MHz Min, 24000MHz Max", Clock Frequency=24GHz, Max Operating Temperature=85°C, Min Operating Temperature=-40°C, Export Control Classification Number (ECCN) Code=EAR99, Height=1mm, Insertion Loss (dB)=2.2dB, Introduction Date=2019-12-24, Length=2mm, Lifecycle Status=Production, Mounting Technology="Surface Mount", RoHS=Compliant, Width=2mm
TP1 TP2 TP3 TP4 TP5 TP6 TP7 TP8 TP9 TP10 TP12 TP13 TP14 TP15 TP16 TP17 TP18 TP19: library part CMP-00284-1, "32 mil (0.8 mm) test point."
U1: library part CMP-00364-1, "Active RF Multipliers x4 10GHz to 40GHz-OUT 40-Pin LGA EP Tray", Clock Frequency=40GHz, Manufacturer Lifecycle Status=PRODUCTION, Max Junction Temperature (Tj)=135°C, Max Operating Temperature=85°C, Min Operating Temperature=-40°C, Bandwidth=7.5GHz, Height=780µm, Lifecycle Status=Production, Pins=40, RoHS=Compliant, Schedule B=8542390000
U2: library part CMP-00379-1, "IC BUS TRANSCVR 8BIT 24TVSOP / Voltage Level Translator 8-CH Bidirectional 24-Pin TVSOP T/R", Case/Package=TFSOP, High Level Output Current=-32mA, Low Level Output Current=32mA, Manufacturer Lifecycle Status=ACTIVE, Max Operating Temperature=85°C, Max Supply Voltage=5.5V, Min Operating Temperature=-40°C, Min Supply Voltage=1.65V, Operating Supply Voltage=3.3V, Quiescent Current=15µA, Contact Plating=Gold, Data Rate=500Mbps, Direction=Bidirectional, Height=1.2mm, Lead Free="Lead Free", Length=5mm, Lifecycle Status=Production, Logic Function="Transceiver, Translator", Mounting Technology="Surface Mount", Number of Bits=8, Number of Channels=8, Number of Circuits=1, Number of Elements=1, Number of Inputs=8, Number of Outputs=8, Number of Transceivers=8, Packaging="Cut Tape", Pins=24, Polarity=Non-Inverting, Propagation Delay=4.2ns, Radiation Hardening=No, REACH SVHC=No, RoHS=Compliant, Schedule B=8542390000, Termination=SMD/SMT, Thickness=1.05mm, Topology=Push-Pull, Turn-On Delay Time=32.2ns, Weight=60.894776mg, Width=4.4mm
U3 U5: library part CMP-00336-1, "Dual Supply Level Translator 2-bit Bidirectional 0.95V to 5.5V 8-Pin VSSOP", Load Capacitance=5pF, Low Level Output Current=12mA, Manufacturer Lifecycle Status="RELEASED FOR SUPPLY", Max Operating Temperature=125°C, Max Supply Current=13µA, Max Supply Voltage=5.5V, Min Operating Temperature=-40°C, Min Supply Voltage=900mV, Operating Supply Voltage=1.2V, China RoHS=Compliant, Clock Edge Trigger Type="Positive Edge", Direction=Bidirectional, Harmonized Tariff Schedule (HTS) Code=8542.39.00.60, Height - Seated (Max)=1mm, Introduction Date=2024-07-25, Length=2.3mm, Lifecycle Status=Production, Number of Bits=2, Number of Channels=1, Number of Circuits=1, Number of Ports=2, Number of Terminals=8, Propagation Delay=16.5ns, REACH SVHC=Yes, RoHS=Compliant, Terminal Pitch=500µm, Width=2mm
U4: library part CMP-00386-1, "LDO Regulator Pos 2.5V 1.2A 8-Pin SOIC N EP T/R", Case/Package=SOIC, Dropout Voltage=120mV, Manufacturer Lifecycle Status=PRODUCTION, Max Junction Temperature (Tj)=125°C, Max Output current=1.2A, Max Supply Voltage=5.5V, Min Current Limit=1.4A, Min Input Voltage=2.3V, Min Operating Temperature=-40°C, Min Supply Voltage=3V, Nominal Output Voltage=2.5V, Quiescent Current=8mA, Accuracy=0.6%, Contact Plating=Tin, Height=1.75mm, Lead Free="Contains Lead", Lifecycle Status=Production, Max Operating Temperature=125°C, Mounting Technology="Surface Mount", Number of Outputs=1, Number of Regulators=1, Output Current=1.2A, Output Type=Fixed, Output Voltage=2.5V, Packaging="Cut Tape", Pins=8, Polarity=Positive, REACH SVHC=No, RoHS=Compliant, Schedule B="8542390000, 8542390000"

## Via types
v1: diameter 25, hole 15, Layer 1 to Layer 4, tented both sides, 283 vias

## Nets (pads, with @x,y where several pads share a name; then routed paths per layer and width w, separated by ;. In a path a pad name is that pad's centre, name@x,y a point inside that pad or via, vN(x,y) a via of type N, cw(c..) or ccw(c..) an arc to the next point about the centre after c; other vN are vias at no path point)
+1.8: C1.2 C13.2 C14.1 C15.1 C18.1 C27.1 J7.3 R1.1 U1.6 U1.7 U2.23 U2.24 U3.8 U5.8 | length 3745.2
  Layer 1 w8: U2.23 4205.87,3000.28 4206.14,3000 C15.1
  Layer 1 w10: U1.7 U1.6 v1(3427.5,2570) C1.2 ; v1(3385,2970) R1.1 ; v1(3540,3265) 3540.69,3264.31 U3.8 3541.19,3220.72 3541.19,3193.81 3559.52,3175.48 3559.52,3153.04 C18.1 ; U5.8 3739.69,3221.11 3740.19,3220.61 3804.39,3220.61 C27.1 3855,3220 v1(3875,3240) ; C15.1 v1(4277.44,3052.44)
  Layer 1 w20: J7.3@4157.56,1570 C14.1 C13.2 v1(4157.56,1812.44)
  Layer 3 w20: v1(3427.5,2570) 3427.5,2927.5 v1(3385,2970) 3385,3110 v1(3540,3265) 3645,3160 3795,3160 v1(3875,3240) 4089.88,3240 v1(4277.44,3052.44) 4157.56,2932.56 v1(4157.56,1812.44)
+2.5: C2.2 C3.1 C4.1 C5.1 C6.1 C7.1 C8.1 C9.1 C10.1 C25.1 J1.11 R4.1 U1.1 U1.21 U1.31 U1.40 U4.1 U4.2 | length 1215.5
  Layer 1 w10: v1(2930,2410) 2952.56,2432.56 C7.1 3102.56,2432.56 3137.57,2467.57 U1.31 ; C6.1@3024.99,2736.57 3023.42,2735 3130,2735 3162.57,2702.43 U1.21 ; C6.1@3034.99,2736.57 C5.1 ; U1.40 3343.74,2380.08 C10.1@3347.69,2376.13 ; U1.1 3392.43,2467.57 3432.73,2427.27 C3.1 ; v1(4685,3220) R4.1
  Layer 1 w20: C10.1@3347.69,2376.13 C9.1 3347.69,2267.31 3360,2255 3441.64,2255 3456.64,2270 v1(3460,2270) ; C3.1 C4.1 3460,2343.98 v1(3460,2270) ; C2.2 3513.78,2268.78 3461.22,2268.78 v1(3460,2270)
  other v1: 4900,1865 4900,1910 3085,2735
CS: R2.3 TP7.1 U2.17 | length 709
  Layer 1 w8: R2.3 3589.63,3004.82 3589.63,3044.63 v1(3590,3045) ; v1(3785,2965) TP7.1 4037.03,2880 4111.38,2954.35 U2.17
  Layer 4 w8: v1(3590,3045) 3705,3045 v1(3785,2965)
CS_ADAR: R1.2 R2.6 TP3.1 U1.14 | length 615.3
  Layer 1 w8: U1.14 3304.37,2743.97 3360.4,2800 3525,2800 TP3.1 R2.6 3589.25,2964.14 3583.39,2970 R1.2
CS_MCU: J1.5 U2.7 | length 429.9
  Layer 1 w8: J1.5 3915,3515 4127.13,3302.87 U2.7
GND: C1.1 C2.1 C3.2 C4.2 C5.2 C6.2 C7.2 C8.2 C9.2 C10.2 C11.1 C12.2 C13.1 C14.2 C15.2 C16.2 C17.2 C18.2 C19.1 C20.2 C21.2 C22.2 C23.2 C24.2 C25.2 C26.2 C27.2 D1.1 J1.12 J2.2 J3.2 J4.2 J5.2 J6.2 J7.4 J7.5 MH1.1 MH2.1 MH3.1 MH4.1 R6.1 R7.1 T1.1 T1.3 T1.7 T2.1 T2.3 T2.7 T3.1 T3.3 T3.7 T4.1 T4.3 T4.7 U1.2 U1.3 U1.5 U1.16 U1.17 U1.20 U1.22 U1.25 U1.26 U1.27 U1.30 U1.32 U1.35 U1.36 U1.37 U1.38 U1.39 U1.41 U1.42 U1.43 U1.44 U2.11 U2.12 U2.13 U3.4 U4.EP U5.4 | length 670.2
  Layer 1 w10: v1(3103.41,2481.91) v1@3107.46,2481.91 ; 3135,2570 U1.26 ; U1.30 3186.26,2491.26 U1.32 ; U1.27 3194.69,2550.31 v1(3195,2550) ; U1.25 3194.68,2589.68 v1(3195,2590) ; U1.22 3159.92,2648.5 U1.44@3186.5,2648.5 ; U1.44@3186.26,2648.74 U1.20 ; v1(3245,2500) 3245.32,2499.68 U1.35 ; v1(3245,2640) 3245.32,2640.32 U1.17 ; 3260,2700 3265,2695 U1.16 ; 3265,2435 U1.36 ; U1.37 3284.68,2499.68 v1(3285,2500) ; U1.38 3304.37,2518.03 v1(3310.67,2524.33) ; U1.39 3324.06,2489.06 v1(3335,2500) ; v1(3335,2550) 3335.31,2550.31 U1.5 ; U1.2 3343.74,2491.26 v1(3335,2500) ; U1.3 3345.94,2510.94 v1(3335,2500) ; C1.1 3516.64,2567.53 3546.04,2567.53 v1(3548.51,2565.06) ; v1(3545.5,3055) 3545.5,3055.5 3560,3070 C18.2
  other v1: 4060,1645 4630,1650 4900,1680 4045,1720 4685,1745 4210,1765 4330,1785 4075,1810 2340.53,1825.4 2267.95,1844.31 1908.4,1850.7 1980.36,1867.83 1810,1880 2053.78,1883.13 2128.78,1883.13 2203.78,1883.13 2388.41,1883.13 2463.41,1883.13 2538.41,1883.13 2613.41,1883.13 2688.41,1883.13 2763.4,1883.59 4300,1900 4665,1915 4720,1915 2829.24,1919.52 4692.27,1940 2059.95,1960.87 2134.95,1960.87 2400.79,1960.87 2475.79,1960.87 2550.79,1960.87 2625.79,1960.87 2700.79,1960.87 1810,1965 4665,1965 4720,1965 2882.27,1972.56 1986.28,1974.97 2774.5,1974.74 2327.83,1978.24 2206.55,1983.18 4375,1995 1903.75,2002.93 2268.98,2024.74 2935.3,2025.59 2827.53,2027.77 4500,2040 4845,2065 2988.34,2078.62 2862.64,2094.05 2928.91,2129.15 3041.37,2131.66 4545,2150 2981.95,2182.18 3094.4,2184.69 3455,2205 3034.98,2235.22 3147.43,2237.72 2206.38,2242.98 2281.38,2243.04 2350.05,2273.19 2137.96,2273.7 1909.1,2279.55 3088.01,2288.25 3200.47,2290.75 1999.67,2304.37 3020,2305 3560,2305 1810,2310 2074.16,2313.13 2413.54,2313.13 2486.03,2332.35 3420,2335 3141.05,2341.28 3247.38,2349.27 2930,2350 2539.85,2384.58 3565,2385 2064.79,2390.87 2380.08,2390.87 1810,2395 1990.9,2403.75 3280,2405 3176.86,2407.18 2453.14,2407.81 2307.37,2409.28 2592.89,2437.61 1885,2440 2181.35,2450.86 2106.39,2453.28 2506.17,2460.84 2255.32,2463.27 2653.41,2481.91 2728.41,2481.91 2803.41,2481.91 2878.41,2481.91 2953.41,2481.91 3028.41,2481.91 3430.17,2496.2 3505.17,2496.2 3580.17,2496.2 3655.17,2496.2 3730.17,2496.2 3805.17,2496.2 3880.17,2496.2 3955.17,2496.2 4030.17,2496.2 4105.17,2496.2 4255.17,2496.2 4330.17,2496.2 4405.17,2496.2 4480.17,2496.2 4555.17,2496.2 4630.17,2496.2 4705.17,2496.2 3195,2500 2559.2,2513.88 3219.33,2524.33 3245,2550 3285,2550 2620.57,2557 2695.52,2559.66 2770.52,2559.66 2845.52,2559.66 2920.52,2559.66 2995.52,2559.66 3070.52,2559.66 3623.51,2565.06 3698.51,2565.06 3773.51,2565.06 3848.51,2565.06 3923.51,2565.06 3998.51,2565.06 4073.51,2565.06 4223.51,2565.06 4298.51,2565.06 4373.51,2565.06 4448.51,2565.06 4523.51,2565.06 4598.51,2565.06 4673.51,2565.06 3245,2590 3285,2590 3335,2590 2572.8,2598.85 3219.33,2615.67 3310.67,2615.67 3195,2640 3285,2640 3335,2640 2236.47,2641.91 2519.58,2651.69 2647.87,2658.09 2722.87,2658.09 2797.87,2658.09 2872.87,2658.09 2947.87,2658.09 3022.87,2658.09 3097.87,2658.09 2305.46,2671.32 2583.93,2697.29 2187.1,2698.36 2466.54,2704.72 1913,2711.43 3815,2715 1978.55,2727.59 3475,2730 1810,2740 2051.92,2743.13 2126.92,2743.13 2327.12,2743.13 2402.12,2743.13 2530.9,2750.32 3175.66,2757.13 2930,2775 3241.97,2799.57 2477.01,2802.49 3125.37,2812.78 1810,2820 2059.43,2820.87 2134.43,2820.87 2329.3,2820.87 2404.3,2820.87 1985.79,2835.14 3945,2840 3192.32,2855.79 2263.35,2856.59 3072.34,2865.81 1885,2870 2940,2870 3695,2905 3139.29,2908.82 2213.49,2912.61 3019.31,2918.85 4010,2945 3086.25,2961.85 2966.28,2971.88 4385,3000 3990,3010 3033.22,3014.88 2913.24,3024.91 2849.52,3064.46 2980.19,3067.92 3440,3095 3805,3110 2397.33,3119.66 2927.15,3120.95 2322.42,3123.38 2809.97,3128.19 1910,3145 1968.59,3157.73 1810,3170 2042,3173.13 2117,3173.13 2192,3173.13 2449.92,3173.13 2524.92,3173.13 2599.92,3173.13 2674.92,3173.13 2749.92,3173.13 2266.99,3173.91 2874.12,3173.98 3990,3195 2820.46,3226.38 4370,3245 2057.1,3250.87 2132.1,3250.87 2207.1,3250.87 2449.57,3250.87 2524.57,3250.87 2599.57,3250.87 2674.57,3250.87 2749.57,3250.87 1810,3255 2374.92,3258.13 1983.59,3265.75 3480,3280 3985,3285 1875,3305 4655,3305 2325.06,3314.15 3345,3325 4370,3340 3860,3415 3315,3420 3652.72,3435 3465,3440 3765,3475 3315,3495 3550,3500
GPIO_DIR: J1.9 R5.1 U5.5 | length 499.6
  Layer 1 w10: 3645,3166.64 v1(3645,3205) 3660.99,3220.99 3680.13,3220.99 3680.36,3221.22 U5.5
  Layer 4 w10: J1.9 3515,3490 3645,3360 v1(3645,3205)
MADV: TP18.1 U1.10 U2.19 | length 988.7
  Layer 1 w8: U1.10 3908.74,2648.74 4142.87,2882.87 U2.19
MADV_MCU: J1.3 U2.5 | length 360.1
  Layer 1 w8: J1.3 4115,3485 4158.62,3441.38 U2.5
MISO: R2.4 TP8.1 U3.7 | length 269.9
  Layer 1 w8: U3.7 3521,3156 3505.09,3140.09 3505.09,3014.91 3515.55,3004.45 R2.4
MISO_MCU: J1.8 U3.2 | length 263.9
  Layer 1 w8: U3.2 3521,3411 3615,3505 J1.8
MOSI: R2.2 TP6.1 U5.7 | length 304.9
  Layer 1 w8: R2.2 3620.75,3040.75 3635,3055 3715.31,3055 3720,3059.69 U5.7
MOSI_MCU: J1.7 U5.2 | length 227.1
  Layer 1 w8: U5.2@3719.5,3345.5 J1.7@3719.5,3565.5
  Layer 1 w10: J1.7 J1.7@3719.5,3565.5 ; U5.2@3719.5,3345.5 U5.2
MRST: TP19.1 U1.11 U2.18 | length 926.5
  Layer 1 w8: U1.11 3828.93,2672.43 3849.26,2672.43 4127.1,2950.28 U2.18
MRST_MCU: J1.4 U2.6 | length 395
  Layer 1 w8: J1.4 4015,3500 4142.87,3372.13 U2.6
NetC11_2: C11.2 C12.1 D2.1 FB1.2
NetC22_1: C22.1 TP15.1 U4.3 | length 190.3
  Layer 1 w10: C22.1@4918.97,1975 C22.1@4919.54,1975.56 ; TP15.1@4984.78,1975.56 TP15.1
  Layer 1 w20: U4.3 4860,1965 4870,1975 C22.1@4918.97,1975 ; C22.1@4919.54,1975.56 TP15.1@4984.78,1975.56
NetC23_1: C23.1 TP13.1 U4.5 U4.6 | length 126.1
  Layer 1 w10: U4.5@4582.5,2017.5 U4.5@4584.26,2019.26 ; C23.1 C23.1@4586.96,2086.28 ; TP13.1@4633.21,2088.88 TP13.1
  Layer 1 w20: U4.5@4584.26,2019.26 C23.1 ; C23.1@4586.96,2086.28 TP13.1@4633.21,2086.28
NetC24_1: C24.1 TP14.1 U4.7 | length 196.2
  Layer 1 w10: TP14.1@4451.26,2006.29 TP14.1
  Layer 1 w20: TP14.1@4451.26,2006.29 4472.56,1984.98 C24.1 4499.96,1945.04 4530,1915 U4.7
NetD1_2: D1.2 R4.2 | length 85.2
  Layer 1 w10: R4.2 4779.06,3220.39 D1.2
NetR3_1: R3.1 TP9.1 U2.2 | length 213.1
  Layer 1 w8: U2.2 4205.87,3184.13 4216.64,3173.36 R3.1
  Layer 1 w10: R3.1 4300.82,3174.18 4369.18,3174.18 TP9.1
NetR6_2: R6.2 TP10.1 U2.22 | length 210.1
  Layer 1 w8: U2.22 4190.12,2897.18 TP10.1 R6.2
NetR7_2: R7.2 TP12.1 U3.5 | length 101.7
  Layer 1 w8: R7.2@3372.02,3222.44 R7.2@3373.24,3222.44 ; R7.2@3382.86,3221.22 U3.5
  Layer 1 w10: R7.2 R7.2@3373.24,3222.44
RFIN: J6.1 U1.4 | length 1609.7
  Layer 1 w11.81: U1.4 3395,2530.63
  Layer 1 w22.54: 3395,2530.63 J6.1@4980,2530.63
RFOUT1: J2.1 T1.2 | length 338
  Layer 1 w8: 1838,1922 T1.2
  Layer 1 w22.54: J2.1 1838,1922
RFOUT1_N: T1.6 U1.33 | length 1750
  Layer 1 w8: T1.6 1973,1948
  Layer 1 w11.46: 1973,1948 cw(c1973,1922.1) 1991.32,1940.41 1992.71,1939.02 1994.46,1937.27 ccw(c2007.89,1950.79) 2007.89,1931.73 2200,1931.73 2215.46,1931.73 ccw(c2215.46,1947.46) 2231.19,1947.46 2231.19,1960.75 cw(c2266.38,1960.75) 2301.57,1960.75 2301.57,1884.9 ccw(c2317.3,1884.9) 2333.03,1884.9 2333.03,1896.54 cw(c2368.22,1896.54) 2368.22,1931.73 2662.77,1931.73 2756.26,1931.73 ccw(c2756.34,1971.25) 2759.56,1931.86 ; 2759.58,1931.86 ccw(c2756.34,1971.25) 2784.33,1943.35 ; 2784.35,1943.38 2862.99,2022.01 2867.04,2026.06 ccw(c2857.69,2035.42) 2867.04,2044.77 2866.8,2045.01 cw(c2876.16,2054.37) 2866.8,2063.72 cw(c2876.16,2054.37) 2885.51,2063.72 2885.75,2063.48 ccw(c2895.11,2072.84) 2904.46,2063.48 2972.99,2132.01 3191.65,2350.67 ; 3191.7,2350.72 ccw(c3157.15,2385.26) 3206,2385.26 3206,2464.51 U1.33
RFOUT1_P: T1.4 U1.34 | length 1750
  Layer 1 w8: T1.4 1973,1896
  Layer 1 w11.46: 1973,1896 ccw(c1973,1921.9) 1991.32,1903.59 1996.12,1908.39 cw(c2005.48,1899.04) 2005.48,1912.27 2200,1912.27 2215.46,1912.27 ccw(c2215.46,1947.46) 2250.65,1947.46 2250.65,1960.75 cw(c2266.38,1960.75) 2282.11,1960.75 2282.11,1884.9 ccw(c2317.3,1884.9) 2352.49,1884.9 2352.49,1896.54 cw(c2368.22,1896.54) 2368.22,1912.27 2662.77,1912.27 2756.26,1912.27 ; 2756.29,1912.27 ccw(c2756.34,1971.25) 2761.05,1912.46 ccw(c2756.34,1971.25) 2798.09,1929.59 3205.41,2336.91 ; 3205.45,2336.96 ccw(c3157.15,2385.26) 3225.46,2385.26 3225.46,2464.51 U1.34
RFOUT2: J3.1 T2.2 | length 338
  Layer 1 w8: 1838,2352 T2.2
  Layer 1 w22.54: J3.1 1838,2352
RFOUT2_N: T2.6 U1.28 | length 1748.4
  Layer 1 w8: T2.6 1973,2378
  Layer 1 w11.46: 1973,2378 cw(c1973,2352.1) 1991.32,2370.41 1992.71,2369.02 1994.46,2367.27 ccw(c2007.89,2380.79) 2007.89,2361.73 2075.92,2361.73 2091.38,2361.73 ccw(c2091.38,2377.46) 2107.11,2377.46 2107.11,2400.33 cw(c2142.3,2400.33) 2177.49,2400.33 2177.49,2305.65 ccw(c2193.22,2305.65) 2208.95,2305.65 2208.95,2400.33 cw(c2244.14,2400.33) 2279.33,2400.33 2279.33,2305.65 ccw(c2295.06,2305.65) 2310.79,2305.65 2310.79,2326.54 cw(c2345.98,2326.54) 2345.98,2361.73 2424.51,2361.73 2431.26,2361.73 ccw(c2431.34,2402.61) 2434.57,2361.86 ; 2434.6,2361.86 ccw(c2431.34,2402.61) 2460.24,2373.7 cw(c2474.05,2359.98) 2460.29,2373.75 2600.52,2513.98 ; 2600.54,2514 cw(c2640.39,2474.18) 2640.24,2530.52 cw(c2640.27,2499.6) 2640.3,2530.52 cw(c2640.39,2511.06) 2640.39,2530.52 3159.57,2530.52 U1.28
RFOUT2_P: T2.4 U1.29 | length 1748.6
  Layer 1 w8: T2.4 1973,2326
  Layer 1 w11.46: 1973,2326 ccw(c1973,2351.9) 1991.32,2333.59 1996.12,2338.39 cw(c2005.48,2329.04) 2005.48,2342.27 2075.92,2342.27 2091.38,2342.27 ccw(c2091.38,2377.46) 2126.57,2377.46 2126.57,2400.33 cw(c2142.3,2400.33) 2158.03,2400.33 2158.03,2305.65 ccw(c2193.22,2305.65) 2228.41,2305.65 2228.41,2400.33 cw(c2244.14,2400.33) 2259.87,2400.33 2259.87,2305.65 ccw(c2295.06,2305.65) 2330.25,2305.65 2330.25,2326.54 cw(c2345.98,2326.54) 2345.98,2342.27 2424.51,2342.27 2431.26,2342.27 ; 2431.29,2342.27 ccw(c2431.34,2402.61) 2436.03,2342.45 ccw(c2431.34,2402.61) 2474.04,2359.98 2614.28,2500.21 ; 2614.3,2500.24 cw(c2640.39,2474.18) 2640.27,2511.06 cw(c2640.27,2499.6) 2640.36,2511.06 ; 2640.39,2511.06 3159.22,2511.06 3159.33,2510.94 U1.29
RFOUT3: J4.1 T3.2 | length 338
  Layer 1 w8: 1838,2782 T3.2
  Layer 1 w22.54: J4.1 1838,2782
RFOUT3_N: T3.4 U1.24 | length 1601.5
  Layer 1 w8: T3.4 1973,2756
  Layer 1 w11.46: 1973,2756 ccw(c1973,2781.9) 1991.32,2763.59 1996.12,2768.39 cw(c2005.48,2759.04) 2005.48,2772.27 2133.43,2772.27 2148.89,2772.27 ccw(c2148.89,2807.46) 2184.08,2807.46 2184.08,2850 cw(c2199.81,2850) 2215.54,2850 2215.54,2704.32 ccw(c2250.73,2704.32) 2285.92,2704.32 2285.92,2756.54 cw(c2301.65,2756.54) 2301.65,2772.27 2349.44,2772.27 2423.75,2772.27 cw(c2423.75,2732.54) 2451.87,2760.61 ; 2451.89,2760.59 ccw(c2465.69,2774.31) 2451.92,2760.55 2592.22,2620.25 ccw(c2618.32,2646.48) 2618.28,2609.48 3159.51,2609.48 U1.24
RFOUT3_P: T3.6 U1.23 | length 1601.3
  Layer 1 w8: T3.6 1973,2808
  Layer 1 w11.46: 1973,2808 cw(c1973,2782.1) 1991.32,2800.41 1992.71,2799.02 1994.46,2797.27 ccw(c2007.89,2810.79) 2007.89,2791.73 2133.43,2791.73 2148.89,2791.73 ccw(c2148.89,2807.46) 2164.62,2807.46 2164.62,2850 cw(c2199.81,2850) 2235,2850 2235,2704.32 ccw(c2250.73,2704.32) 2266.46,2704.32 2266.46,2756.54 cw(c2301.65,2756.54) 2301.65,2791.73 2349.44,2791.73 2423.75,2791.73 cw(c2423.75,2772.27) 2423.83,2791.73 cw(c2423.75,2732.54) 2465.63,2774.37 cw(c2451.93,2760.55) 2465.69,2774.31 cw(c2451.93,2760.55) 2465.75,2774.25 2605.96,2634.04 ccw(c2618.32,2646.48) 2618.3,2628.94 3159.51,2628.94 U1.23
RFOUT4: J5.1 T4.2 | length 338
  Layer 1 w8: 1838,3212 T4.2
  Layer 1 w22.54: J5.1 1838,3212
RFOUT4_N: T4.4 U1.19 | length 1750.3
  Layer 1 w8: T4.4 1973,3186
  Layer 1 w11.46: 1973,3186 ccw(c1973,3211.9) 1991.32,3193.59 1996.12,3198.39 cw(c2005.48,3189.04) 2005.48,3202.27 2245,3202.27 2260.46,3202.27 ccw(c2260.46,3237.46) 2295.65,3237.46 2295.65,3251.54 cw(c2311.38,3251.54) 2327.11,3251.54 2327.11,3173.28 ccw(c2362.3,3173.28) 2397.49,3173.28 2397.49,3186.54 cw(c2413.22,3186.54) 2413.22,3202.27 2490,3202.27 2756.68,3202.27 cw(c2756.68,3181.68) 2759.42,3202.09 ; 2759.44,3202.08 cw(c2756.68,3181.68) 2763.13,3201.23 ccw(c2772.61,3230.67) 2766.54,3200.35 cw(c2756.68,3149.65) 2770.15,3199.51 cw(c2756.68,3149.65) 2793.16,3186.21 2822.17,3157.2 2826.22,3153.14 2844.93,3134.43 cw(c2835.58,3125.08) 2844.93,3115.72 2844.82,3115.61 ccw(c2854.18,3106.26) 2844.82,3096.9 ccw(c2854.18,3106.26) 2863.53,3096.9 2863.64,3097.01 cw(c2873,3087.66) 2882.35,3097.01 2914.17,3065.2 2918.22,3061.15 3191.2,2788.16 cw(c3157.85,2754.88) 3204.97,2754.88 3204.97,2692.95 ccw(c3235.89,2692.95) 3205.01,2691.48 3205.77,2675.49 U1.19
RFOUT4_P: T4.6 U1.18 | length 1749.9
  Layer 1 w8: T4.6 1973,3238
  Layer 1 w11.46: 1973,3238 cw(c1973,3212.1) 1991.32,3230.41 1992.71,3229.02 1994.46,3227.27 ccw(c2007.89,3240.79) 2007.89,3221.73 2245,3221.73 2260.46,3221.73 ccw(c2260.46,3237.46) 2276.19,3237.46 2276.19,3251.54 cw(c2311.38,3251.54) 2346.57,3251.54 2346.57,3173.28 ccw(c2362.3,3173.28) 2378.03,3173.28 2378.03,3186.54 cw(c2413.22,3186.54) 2413.22,3221.73 2490,3221.73 2756.68,3221.73 ; 2756.76,3221.73 cw(c2756.68,3181.68) 2761.99,3221.38 cw(c2757.93,3190.72) 2762.04,3221.37 cw(c2756.68,3181.68) 2769.13,3219.74 ccw(c2772.61,3230.67) 2770.32,3219.44 cw(c2756.68,3149.65) 2806.92,3199.97 2918.44,3088.44 2984.57,3022.32 3204.96,2801.93 ; 3204.99,2801.9 cw(c3157.85,2754.88) 3224.43,2754.88 3224.43,2692.95 ccw(c3235.89,2692.95) 3224.45,2692.29 3225.45,2675.49 U1.18@3225.4,2675.54
SCK: R2.1 TP5.1 U2.16 | length 558.3
  Layer 1 w8: R2.1@3652.8,3005 3800,3005 TP5.1 3945,2895 4032.23,2895 4094.91,2957.68 4094.91,3001.28 U2.16
SCK_MCU: J1.6 U2.8 | length 502.8
  Layer 1 w8: J1.6 3815,3515 4025,3305 4090,3305 4111.38,3283.62 U2.8
SCLK_ADAR: R2.8 TP1.1 U1.12 | length 529.3
  Layer 1 w8: U1.12 3343.74,2728.74 3380,2765 3520.93,2765 3535.93,2750 3585,2750 TP1.1 R2.8
SDIO_ADAR: R2.7 TP2.1 U1.13 | length 488.6
  Layer 1 w8: U1.13 3324.06,2734.06 3375,2785 TP2.1 3620.75,2850.75 R2.7
SDO_ADAR: R2.5 TP4.1 U1.15 | length 458.3
  Layer 1 w8: U1.15 3284.68,2749.68 3380,2845 3455,2845 TP4.1 3557.76,2877.76 R2.5
TxADV: TP16.1 U1.8 U2.21 | length 1108.8
  Layer 1 w8: U1.8 4024.37,2609.37 TP16.1 U2.21
TxADV_MCU: J1.1 U2.3 | length 393.7
  Layer 1 w8: U2.3 4190.12,3385.12 4315,3510 J1.1
TxRST: TP17.1 U1.9 U2.20 | length 1047.3
  Layer 1 w8: U1.9 3964.05,2629.05 4158.62,2823.62 U2.20
TxRST_MCU: J1.2 U2.4 | length 358.8
  Layer 1 w8: U2.4 4174.37,3439.37 4215,3480 J1.2
Vin: D2.2 J7.1 J7.2
VinF: C21.1 FB1.1 U4.4 U4.8 | length 469.3
  Layer 1 w20: U4.4 v1(4860,2015)
  Layer 3 w20: v1(4555,1835) 4730,1835 4860,1965 v1(4860,2015)
VLogic: C16.1 C17.1 C19.2 C20.1 C26.1 J1.10 R3.2 R5.2 U2.1 U3.1 U5.1 | length 1852.8
  Layer 1 w8: U2.1 4221.61,3276.61 4240.13,3295.13 C16.1 4274.38,3293.84 4274.38,3272.21 4297.84,3248.75 4297.84,3228.8 R3.2
  Layer 1 w10: J1.10 J1.10@3415.67,3569.33 ; C20.1@3415.67,3455.67 C20.1 ; U3.1 C17.1@3603.14,3345 ; C17.1 3605,3339.92 3605,3110 3616.64,3098.36 R5.2 ; U5.1 3739.69,3343.73 3740.19,3343.23 C26.1 3801.07,3342.16 v1(3801.07,3301.07) ; C16.1 4273.09,3358.09 v1(4274.05,3359.05) v1@4275,3360
  Layer 1 w20: C20.1@3415.67,3455.67 J1.10@3415.67,3569.33 ; C20.1 3416.77,3454.57 3416.77,3380.47 C19.2 v1(3417.19,3326.25)
  Layer 3 w20: v1(3417.19,3326.25) 3558.75,3326.25 v1(3605,3280) 3780,3280 v1(3801.07,3301.07) 3859.05,3359.05 v1(4274.05,3359.05)
pads on no net: T1.5 T2.5 T3.5 T4.5 U2.9 U2.10 U2.14 U2.15 U3.3 U3.6 U5.3 U5.6

## Polygon pours and split planes (outlines as drawn)
GND on Layer 2 "GND_L02_P003" (solid, remove dead copper, pour order 3): 1515,1570 1515,3570 cw(c1765,3570) 1765,3820 4765,3820 cw(c4765,3570) 5015,3570 5015,1570 cw(c4765,1570) 4765,1320 1765,1320 cw(c1765,1570)
GND on Layer 4 "GND_L04_P001" (solid, remove dead copper, pour order 1): 1515,1570 1515,3570 cw(c1765,3570) 1765,3820 4765,3820 cw(c4765,3570) 5015,3570 5015,1570 cw(c4765,1570) 4765,1320 1765,1320 cw(c1765,1570)